# Altium PCB A1.PcbDoc (part 3 of 3)
Units mil, origin at the board's own origin, x right, y up, seen from the top; angles counter-clockwise.
Board outline 3937.01 x 3149.61 mil, 2 copper layers (Top Layer, Bottom Layer); 91 components, 93 nets, 317 pads, 42 vias.
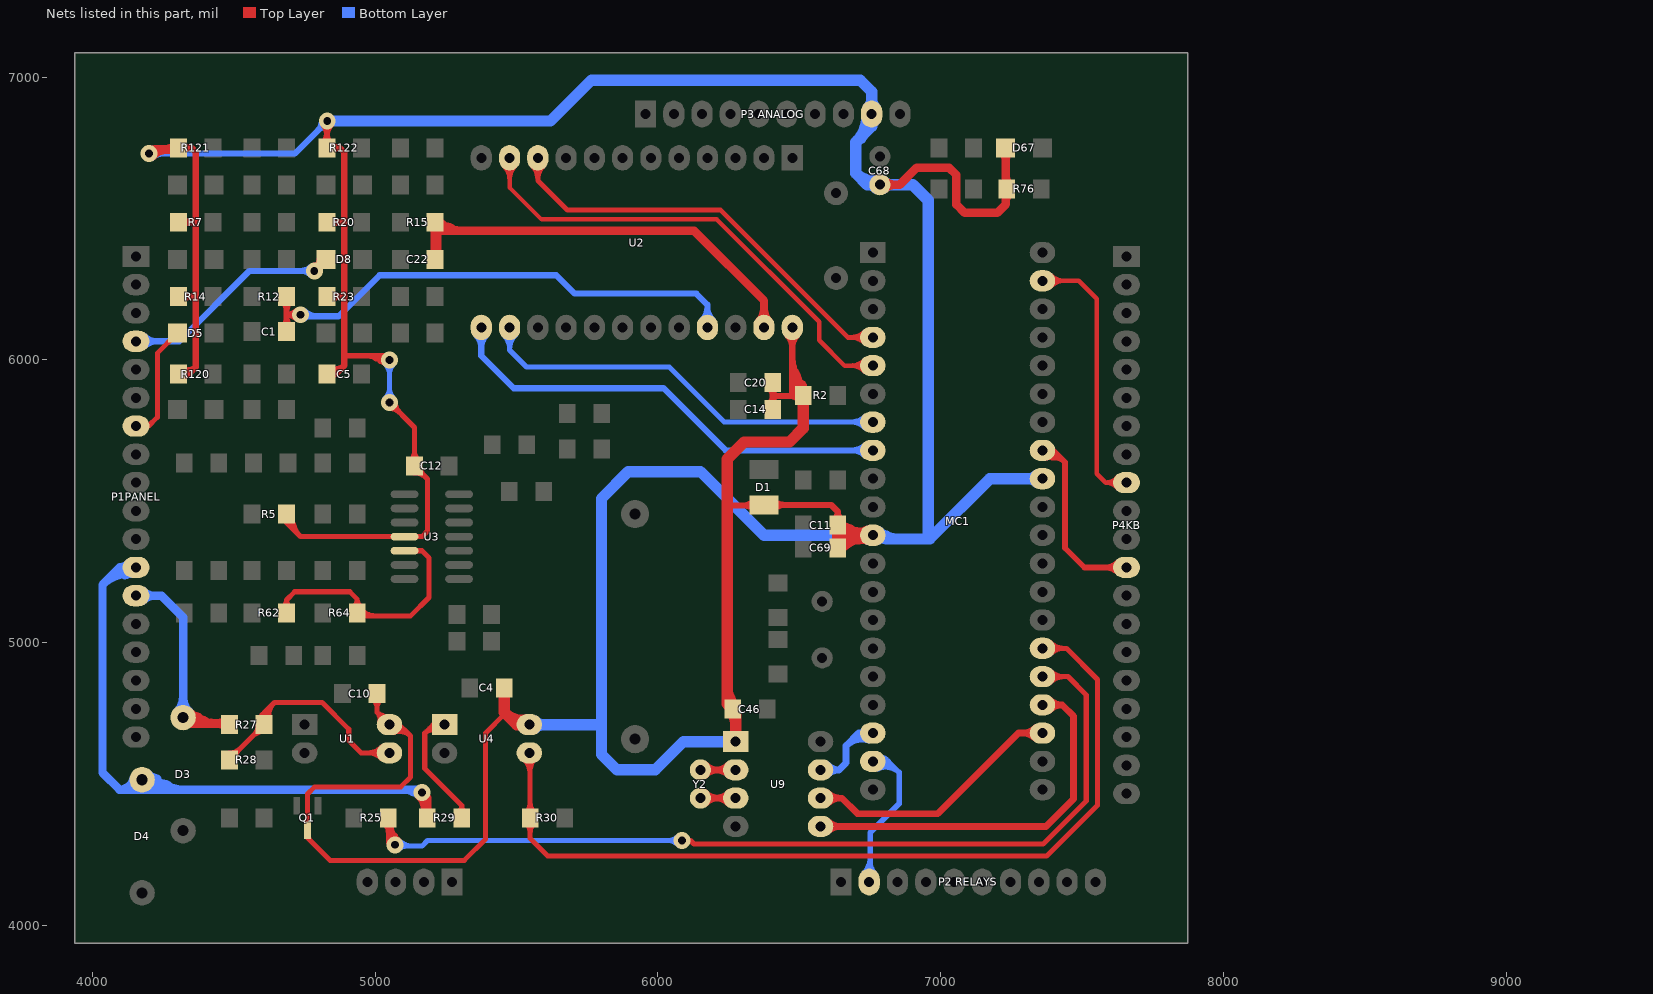
[diagram p3: the nets of this part, all layers, seen from the top]

## Via types
v1: diameter 60, hole 28, Top Layer to Bottom Layer, 31 vias
v2: diameter 90, hole 35.43, Top Layer to Bottom Layer, 6 vias
v3: diameter 75, hole 28, Top Layer to Bottom Layer, 3 vias
v4: diameter 75, hole 35.43, Top Layer to Bottom Layer, 2 vias

## Nets (pads, with @x,y where several pads share a name; then routed paths per layer and width w, separated by ;. In a path a pad name is that pad's centre, name@x,y a point inside that pad or via, vN(x,y) a via of type N, cw(c..) or ccw(c..) an arc to the next point about the centre after c; other vN are vias at no path point) (continued)
NetR27_1: R27.1 R28.2 U1.3 | length 1776.5
  Top Layer w18: R28.2@4483.98,4585 4483.98,4587.95 R27.1@4606.02,4710 4606.02,4751.02 ; 4573.58,4676.84 ccw(c4562.58,4717.89) R27.1@4603.59,4706.73 ; U1.3@5050,4610 4950,4610 4906,4654 4906,4694 4812,4788 4643,4788 ; 4606.02,4751.02 ccw(c4629.26,4751.02) 4616.92,4731.33 cw(c4629.26,4751.02) 4606.02,4751.02 ; 4606.02,4751.02 cw(c4582.79,4751.02) 4595.13,4731.33 ccw(c4582.79,4751.02) 4606.02,4751.02 ; 4606.02,4751.02 4643,4788 ; 4643,4788 ccw(c4691.63,4739.37) 4625.7,4719.78 cw(c4691.63,4739.37) 4643,4788 ; 4973.69,4610 ccw(c4973.69,4678.81) 5022.35,4630.15 cw(c4973.69,4678.81) 4973.69,4610 ; 4973.69,4610 cw(c4973.69,4541.19) 5022.35,4589.85 ccw(c4973.69,4541.19) 4973.69,4610 ; R28.2@4483.98,4609.46 ccw(c4483.98,4661.4) 4520.7,4624.68 cw(c4483.98,4661.4) R28.2@4483.98,4609.46 ; R28.2@4504.5,4588.94 cw(c4551.68,4588.94) 4518.32,4622.3 ccw(c4551.68,4588.94) R28.2@4504.5,4588.94 ; 4564.26,4668.24 cw(c4606.02,4626.47) 4606.02,4685.54 ccw(c4606.02,4626.47) 4564.26,4668.24 ; 4573.77,4677.74 ccw(c4545.44,4706.06) 4585.5,4706.06 cw(c4545.44,4706.06) 4573.77,4677.74 ; R27.1@4591.19,4709.53 cw(c4625.71,4719.79) 4600.25,4745.25 ccw(c4625.71,4719.79) R27.1@4591.19,4709.53 ; R27.1@4608.45,4714.66 cw(c4658.67,4729.58) 4621.62,4766.62 ccw(c4658.67,4729.58) R27.1@4608.45,4714.66
NetR29_2: R29.2 U4.1 | length 738
  Top Layer w18: U4.1@5245,4710 5205,4710 5175,4680 ; R29.2@5306.02,4380 5306.02,4423.98 5175,4555 5175,4680 ; 5175,4680 cw(c5202.43,4652.57) 5222.65,4685.68 ccw(c5202.43,4652.57) 5175,4680 ; 5306.02,4423.97 ccw(c5334.81,4423.97) 5318.01,4400.6 cw(c5334.81,4423.97) 5306.02,4423.97 ; 5306.02,4423.97 cw(c5277.24,4423.97) 5294.04,4400.6 ccw(c5277.24,4423.97) 5306.02,4423.97 ; 5191.17,4696.17 cw(c5214.69,4672.65) 5232.03,4701.04 ccw(c5214.69,4672.65) 5191.17,4696.17
NetR62_2: R62.2 R64.2 U3.5 | length 1298.6
  Top Layer w18: R62.2@4686.02,5105 4686.02,5151.02 ; U3.5@5103.54,5325 5165,5325 5190,5300 5190,5160 5125,5095 4946.02,5095 R64.2@4936.02,5105 4936.02,5153.98 4910,5180 4715,5180 4686.02,5151.02 ; 4686.02,5151.02 ccw(c4718.9,5151.02) 4698.66,5125.11 cw(c4718.9,5151.02) 4686.02,5151.02 ; 4686.02,5151.02 cw(c4653.15,5151.02) 4673.39,5125.11 ccw(c4653.15,5151.02) 4686.02,5151.02 ; 4936.02,5153.97 ccw(c4975.17,5153.97) 4949.49,5124.43 cw(c4975.17,5153.97) 4936.02,5153.97 ; 4936.02,5153.97 cw(c4896.88,5153.97) 4922.56,5124.43 ccw(c4896.88,5153.97) 4936.02,5153.97 ; R64.2@4950.54,5086.55 cw(c4970.94,5066.14) 4970.94,5095 ccw(c4970.94,5066.14) R64.2@4950.54,5086.55 ; R64.2@4950.54,5115.58 ccw(c5000.22,5165.26) 5000.22,5095 cw(c5000.22,5165.26) R64.2@4950.54,5115.58
NetU9_2: U9.2 Y2.1 | length 511.8
  Top Layer w24: Y2.1@6150,4550 U9.2@6275,4550 ; 6205.94,4550 ccw(c6205.94,4611.56) 6249.47,4568.03 cw(c6205.94,4611.56) 6205.94,4550 ; 6205.94,4550 cw(c6205.94,4488.44) 6249.47,4531.97 ccw(c6205.94,4488.44) 6205.94,4550 ; 6211.56,4550 ccw(c6211.56,4488.44) 6168.03,4531.97 cw(c6211.56,4488.44) 6211.56,4550 ; 6211.56,4550 cw(c6211.56,4611.56) 6168.03,4568.03 ccw(c6211.56,4611.56) 6211.56,4550
NetU9_3: U9.3 Y2.2 | length 511.8
  Top Layer w24: Y2.2@6150,4450 U9.3@6275,4450 ; 6205.94,4450 ccw(c6205.94,4511.56) 6249.47,4468.03 cw(c6205.94,4511.56) 6205.94,4450 ; 6205.94,4450 cw(c6205.94,4388.44) 6249.47,4431.97 ccw(c6205.94,4388.44) 6205.94,4450 ; 6211.56,4450 ccw(c6211.56,4388.44) 6168.03,4431.97 cw(c6211.56,4388.44) 6211.56,4450 ; 6211.56,4450 cw(c6211.56,4511.56) 6168.03,4468.03 ccw(c6211.56,4511.56) 6211.56,4450
PREHEATER: "P2 RELAYS.2" MC1.19 | length 1259.4
  Bottom Layer w20: 6747.24,4153.54 6751,4157.3 6751,4328 6853,4430 6853,4541 ; MC1.19@6760,4580 6814,4580 ; 6814,4580 ccw(c6814,4554.44) 6791.6,4566.75 cw(c6814,4554.44) 6814,4580 ; 6814,4580 cw(c6814,4605.56) 6791.6,4593.25 ccw(c6814,4605.56) 6814,4580 ; 6814,4580 6853,4541 ; 6853,4541 ccw(c6805.72,4493.72) 6778.64,4554.86 cw(c6805.72,4493.72) 6853,4541 ; 6727.8,4182.99 ccw(c6671.79,4239) 6751,4239 cw(c6671.79,4239) 6727.8,4182.99 ; 6751,4220.87 ccw(c6804.57,4220.87) 6766.69,4182.99 cw(c6804.57,4220.87) 6751,4220.87 ; MC1.19@6762.44,4591.43 cw(c6780.4,4550.88) 6811.76,4582.24 ccw(c6780.4,4550.88) MC1.19@6762.44,4591.43 ; MC1.19@6770.54,4573.14 cw(c6793.06,4522.3) 6832.38,4561.62 ccw(c6793.06,4522.3) MC1.19@6770.54,4573.14
R1IN: D4.2 P1PANEL.12 R29.1 | length 4132.7
  Top Layer w30: v1(5165,4470) 5183.98,4451.02 R29.1@5183.98,4380 ; R29.1@5171.39,4391.2 ccw(c5137.93,4410.52) 5175.26,4420.52 ; 5176.35,4421.36 cw(c5209.68,4440.6) v1@5177.53,4461.75 ; 5176.56,4415.65 ccw(c5206.99,4423.8) R29.1@5191.24,4396.52 ; 5183.98,4419.01 ccw(c5219.05,4419.01) 5194.25,4394.21 cw(c5219.05,4419.01) 5183.98,4419.01 ; 5183.98,4419.01 cw(c5148.9,4419.01) 5173.7,4394.21 ccw(c5148.9,4419.01) 5183.98,4419.01 ; v1@5154.39,4459.39 cw(c5082.97,4387.97) 5183.98,4387.97 ccw(c5082.97,4387.97) v1@5154.39,4459.39
  Bottom Layer w30: 4113.45,5238.8 ccw(c4103.76,5294.05) P1PANEL.12@4149.68,5261.83 ; P1PANEL.12@4153.54,5266.14 4096.14,5266.14 ; D4.2@4186.12,4487.14 cw(c4204.18,4441.84) 4228.57,4484.07 cw(c4252.95,4526.31) D4.2@4204.69,4519.31 ; D4.2@4192.74,4490.81 cw(c4233.39,4435.38) 4267.76,4494.91 ; 4227.95,4517.89 ccw(c4203.69,4475.88) D4.2@4175,4515 ; 5130.1,4473.42 ccw(c5138.62,4488.17) v1@5152.65,4478.51 ; v1(5165,4470) 5155,4480 D4.2@4175,4480 ; 4035,5205 cw(c4129.75,5110.25) 4141.56,5243.73 ccw(c4129.75,5110.25) 4035,5205 ; 4035,5205 4096.14,5266.14 ; 4035,5205 4035,4540 4095,4480 ; 4095,4480 ccw(c4095,4531.73) 4145.64,4521.14 cw(c4095,4531.73) 4095,4480 ; 4095,4480 D4.2@4175,4480 ; 4096.14,5266.14 ccw(c4096.14,5304.82) 4126.11,5280.37 cw(c4096.14,5304.82) 4096.14,5266.14 ; 4096.14,5266.14 cw(c4096.14,5227.46) 4126.11,5251.92 ccw(c4096.14,5227.46) 4096.14,5266.14 ; D4.2@4175,4480 D4.2@4175,4515 ; D4.2@4175,4515 cw(c4131.92,4524.01) 4131.92,4480 ccw(c4131.92,4524.01) D4.2@4175,4515 ; D4.2@4175,4515 ccw(c4259.5,4599.5) 4259.5,4480 cw(c4259.5,4599.5) D4.2@4175,4515 ; 4080.44,5250.44 cw(c4137.14,5193.74) 4144.2,5273.61 ccw(c4137.14,5193.74) 4080.44,5250.44 ; D4.2@4196.21,4536.21 ccw(c4331.92,4671.92) 4331.92,4480 cw(c4331.92,4671.92) D4.2@4196.21,4536.21 ; 5104.64,4480 cw(c5104.64,4409.64) 5154.39,4459.39 ccw(c5104.64,4409.64) 5104.64,4480
RC6: MC1.25 R25.1 | length 4520.1
  Top Layer w18: R25.1@5036.1,4358.1 cw(c5012.01,4314.5) 5060.12,4327.39 ; v1@5051.99,4295.8 ccw(c5036.01,4305.38) 5051.14,4316.24 ccw(c5071.12,4330.58) v1@5070.52,4305.99 ; v1@5054.39,4299.05 ccw(c5030.99,4320.12) 5056.57,4338.49 ; 5059.2,4330.83 cw(c5103.71,4342.76) R25.1@5063.8,4365.8 ; v1@5067.77,4287.01 ccw(c5048,4304.81) 5069.61,4320.33 ; v1(5070,4285) 5070,4280 5046.02,4303.98 ; v1(6085,4300) 6115,4300 6127.5,4287.5 7362.5,4287.5 7515,4440 7515,4815 7450,4880 MC1.25@7360,4880 ; 5046.02,4303.98 ccw(c5053.14,4311.09) 5058.6,4302.64 cw(c5053.14,4311.09) 5046.02,4303.98 ; 5046.02,4303.98 cw(c5036.03,4293.98) 5049.7,4290.37 ccw(c5036.03,4293.98) 5046.02,4303.98 ; 5046.02,4303.98 R25.1@5046.02,4380 ; 5046.02,4326.51 ccw(c4996.47,4326.51) 5031.51,4361.55 cw(c4996.47,4326.51) 5046.02,4326.51 ; 5046.02,4326.51 cw(c5095.58,4326.51) 5060.54,4361.55 ccw(c5095.58,4326.51) 5046.02,4326.51 ; R25.1@5046.02,4380 ccw(c5147.83,4380) 5083.31,4301.24 cw(c5147.83,4380) R25.1@5046.02,4380 ; 7436.31,4880 ccw(c7436.31,4811.19) 7387.65,4859.85 cw(c7436.31,4811.19) 7436.31,4880 ; 7436.31,4880 cw(c7436.31,4948.81) 7387.65,4900.15 ccw(c7436.31,4948.81) 7436.31,4880 ; 5046.02,4303.96 ccw(c5085.53,4303.96) 5060.49,4273.4 cw(c5085.53,4303.96) 5046.02,4303.96 ; 5046.02,4341.98 ccw(c5116.68,4341.98) 5071.9,4287.32 cw(c5116.68,4341.98) 5046.02,4341.98
  Bottom Layer w18: v1(5070,4285) 5070,4280 5165,4280 5185,4300 v1(6085,4300) ; 6034.3,4300 ccw(c6034.3,4350.7) 6070.15,4314.85 cw(c6034.3,4350.7) 6034.3,4300 ; 6034.3,4300 cw(c6034.3,4249.3) 6070.15,4285.15 ccw(c6034.3,4249.3) 6034.3,4300 ; v1@5084.85,4270.15 cw(c5108.63,4246.37) 5108.63,4280 ccw(c5108.63,4246.37) v1@5084.85,4270.15 ; v1@5084.85,4299.85 ccw(c5132.77,4347.77) 5132.77,4280 cw(c5132.77,4347.77) v1@5084.85,4299.85
RC7: MC1.26 R30.1 U4.3 | length 3840.7
  Top Layer w18: U4.3@5545,4610 5547.95,4607.05 R30.1@5547.95,4380 5547.95,4307.05 5610,4245 7375,4245 7555,4425 7555,4870 7445,4980 MC1.26@7360,4980 ; 5547.95,4326.51 ccw(c5498.39,4326.51) 5533.44,4361.55 cw(c5498.39,4326.51) 5547.95,4326.51 ; 5547.95,4326.51 cw(c5597.51,4326.51) 5562.47,4361.55 ccw(c5597.51,4326.51) 5547.95,4326.51 ; 5547.95,4433.49 ccw(c5597.51,4433.49) 5562.47,4398.45 cw(c5597.51,4433.49) 5547.95,4433.49 ; 5547.95,4433.49 cw(c5498.39,4433.49) 5533.44,4398.45 ccw(c5498.39,4433.49) 5547.95,4433.49 ; 7436.31,4980 ccw(c7436.31,4911.19) 7387.65,4959.85 cw(c7436.31,4911.19) 7436.31,4980 ; 7436.31,4980 cw(c7436.31,5048.81) 7387.65,5000.15 ccw(c7436.31,5048.81) 7436.31,4980 ; U4.3@5524.85,4589.85 cw(c5469.07,4534.07) 5547.95,4534.07 ccw(c5469.07,4534.07) U4.3@5524.85,4589.85 ; 5547.95,4548.32 cw(c5606.68,4548.32) 5565.15,4589.85 ccw(c5606.68,4548.32) 5547.95,4548.32
REMOT: C1.2 R12.2 U2.21 | length 2569.3
  Top Layer w22: C1.2@4686.02,6100 4686.02,6160 ; R12.2@4686.02,6224.43 4686.02,6160 ; v1(4735,6160) 4686.02,6160 ; 4686.02,6148.67 ccw(c4730.75,6148.67) 4699.12,6117.04 cw(c4730.75,6148.67) 4686.02,6148.67 ; 4686.02,6148.67 cw(c4641.29,6148.67) 4672.92,6117.04 ccw(c4641.29,6148.67) 4686.02,6148.67 ; 4686.02,6175.76 ccw(c4641.29,6175.76) 4672.92,6207.39 cw(c4641.29,6175.76) 4686.02,6175.76 ; 4686.02,6175.76 cw(c4730.75,6175.76) 4699.12,6207.39 ccw(c4730.75,6175.76) 4686.02,6175.76 ; 4689.13,6160 ccw(c4689.13,6205.87) 4721.56,6173.44 cw(c4689.13,6205.87) 4689.13,6160 ; 4689.13,6160 cw(c4689.13,6114.13) 4721.56,6146.56 ccw(c4689.13,6114.13) 4689.13,6160
  Bottom Layer w22: v1(4735,6160) 4740,6155 4870,6155 5015,6300 5640,6300 5705,6235 6135,6235 6175,6195 U2.21@6175,6115 ; 6175,6186.48 ccw(c6238.98,6186.48) 6193.74,6141.24 cw(c6238.98,6186.48) 6175,6186.48 ; 6175,6186.48 cw(c6111.02,6186.48) 6156.26,6141.24 ccw(c6111.02,6186.48) 6175,6186.48 ; v1@4748.44,6146.56 cw(c4768.8,6126.2) 4768.8,6155 ccw(c4768.8,6126.2) v1@4748.44,6146.56 ; v1@4748.44,6173.44 ccw(c4792.94,6217.94) 4792.94,6155 cw(c4792.94,6217.94) v1@4748.44,6173.44
REMOTIN: D5.2 P1PANEL.7 | length 415.7
  Top Layer w18: P1PANEL.7@4153.54,5766.14 4198.14,5766.14 4229,5797 4229,6023.96 D5.2@4300.04,6095
RESET: MC1.33 P4KB.12 | length 1038.9
  Top Layer w20: MC1.33@7359.04,5670.79 ccw(c7399.98,5715.36) 7402.55,5654.9 ; MC1.33@7360,5680 7398,5680 7440,5638 ; P4KB.12@7628.03,5246.7 ccw(c7581.09,5199.75) 7581.09,5266.14 ccw(c7581.09,5332.53) P4KB.12@7628.03,5285.59 ; P4KB.12@7657.48,5266.14 7508.86,5266.14 7440,5335 7440,5638 ; 7440,5638 ccw(c7394.87,5592.87) 7375.74,5653.76 cw(c7394.87,5592.87) 7440,5638 ; MC1.33@7369.75,5672.84 cw(c7383.71,5628.38) 7416.66,5661.34 ccw(c7383.71,5628.38) MC1.33@7369.75,5672.84
RSTART: C22.2 R15.2 U2.23 | length 2566.9
  Top Layer w30: R15.2@5211.02,6487.21 C22.2@5211.02,6355.82 5220,6364.79 5220,6457 6128,6457 6375,6210 U2.23@6375,6115 ; 5213.71,6392.47 ccw(c5226.85,6384.89) C22.2@5218.76,6372.05 ; 5213.71,6450.56 cw(c5226.85,6458.14) R15.2@5218.76,6470.98 ; R15.2@5216.17,6469.69 cw(c5238.57,6410.49) 5270.21,6465.3 ; C22.2@5200.75,6370.03 ccw(c5154.28,6416.5) 5220,6416.5 cw(c5154.28,6416.5) C22.2@5200.75,6370.03 ; C22.2@5200.75,6370.03 ccw(c5175.95,6394.83) 5211.02,6394.83 ; C22.2@5200.75,6370.03 ccw(c5175.95,6394.83) 5211.02,6394.83 ; R15.2@5200.75,6473 cw(c5154.28,6426.53) 5220,6426.53 ccw(c5154.28,6426.53) R15.2@5200.75,6473 ; R15.2@5200.75,6473 cw(c5175.95,6448.2) 5211.02,6448.2 ; R15.2@5200.75,6473 cw(c5175.95,6448.2) 5211.02,6448.2 ; 5211.02,6394.83 ccw(c5246.1,6394.83) 5221.3,6370.03 cw(c5246.1,6394.83) 5211.02,6394.83 ; 5211.02,6448.2 cw(c5246.1,6448.2) 5221.3,6473 ccw(c5246.1,6448.2) 5211.02,6448.2 ; 6375,6176.82 ccw(c6429.32,6176.82) 6390.91,6138.41 cw(c6429.32,6176.82) 6375,6176.82 ; 6375,6176.82 cw(c6320.68,6176.82) 6359.09,6138.41 ccw(c6320.68,6176.82) 6375,6176.82 ; R15.2@5200.08,6472.33 ccw(c5237.1,6509.35) 5237.1,6457 cw(c5237.1,6509.35) R15.2@5200.08,6472.33 ; R15.2@5221.3,6493.55 ccw(c5309.53,6581.78) 5309.53,6457 cw(c5309.53,6581.78) R15.2@5221.3,6493.55
RSTARTIN: D8.2 P1PANEL.4 | length 1743.3
  Top Layer w22: v1@4781.28,6315.6 cw(c4811.44,6309.43) D8.2@4803.47,6339.16 ; v1(4784.22,6315) D8.2@4825.04,6355.82 ; v1@4784.82,6312.06 ccw(c4778.65,6342.21) D8.2@4808.38,6334.25 ; v1@4785.49,6333.96 ccw(c4786.59,6350.54) D8.2@4800.99,6342.23 ; v1@4785.49,6333.96 ccw(c4786.59,6350.54) D8.2@4800.99,6342.23 ; v1@4785.49,6333.96 ccw(c4786.59,6350.54) D8.2@4800.99,6342.23 ; v1@4786.69,6317.47 ccw(c4748.34,6355.82) 4802.58,6355.82 cw(c4748.34,6355.82) v1@4786.69,6317.47 ; v1@4786.69,6317.47 cw(c4825.04,6279.12) 4825.04,6333.35 ccw(c4825.04,6279.12) v1@4786.69,6317.47 ; D8.2@4793.44,6331.61 ccw(c4802.31,6347.6) D8.2@4811.45,6331.77 ; D8.2@4793.44,6331.61 ccw(c4802.31,6347.6) D8.2@4811.45,6331.77 ; D8.2@4793.44,6331.61 ccw(c4802.31,6347.6) D8.2@4811.45,6331.77 ; D8.2@4800.84,6324.22 cw(c4816.82,6333.09) D8.2@4800.99,6342.23 ; D8.2@4800.84,6324.22 cw(c4816.82,6333.09) D8.2@4800.99,6342.23 ; D8.2@4800.84,6324.22 cw(c4816.82,6333.09) D8.2@4800.99,6342.23 ; v1@4803.18,6316.26 cw(c4819.77,6317.37) D8.2@4811.45,6331.77 ; v1@4803.18,6316.26 cw(c4819.77,6317.37) D8.2@4811.45,6331.77 ; v1@4803.18,6316.26 cw(c4819.77,6317.37) D8.2@4811.45,6331.77 ; D8.2@4816.66,6347.44 ccw(c4849.09,6315) 4803.22,6315 cw(c4849.09,6315) D8.2@4816.66,6347.44 ; D8.2@4816.66,6347.44 cw(c4784.22,6379.87) 4784.22,6334 ccw(c4784.22,6379.87) D8.2@4816.66,6347.44
  Bottom Layer w22: P1PANEL.4@4153.54,6066.14 4306.14,6066.14 4555,6315 v1(4784.22,6315) ; 4227.52,6066.14 ccw(c4227.52,6002.17) 4182.28,6047.4 cw(c4227.52,6002.17) 4227.52,6066.14 ; 4227.52,6066.14 cw(c4227.52,6130.12) 4182.28,6084.88 ccw(c4227.52,6130.12) 4227.52,6066.14 ; 4738.35,6315 ccw(c4738.35,6360.87) 4770.79,6328.44 cw(c4738.35,6360.87) 4738.35,6315 ; 4738.35,6315 cw(c4738.35,6269.13) 4770.79,6301.56 ccw(c4738.35,6269.13) 4738.35,6315
S0: MC1.4 U2.10 | length 1962.2
  Top Layer w18: U2.10@5575,6750 U2.10@5575,6715 5575,6635 5680,6530 6221.67,6530 6671.67,6080 MC1.4@6760,6080 ; 5575,6638.69 ccw(c5506.19,6638.69) 5554.85,6687.35 cw(c5506.19,6638.69) 5575,6638.69 ; 5575,6638.69 cw(c5643.81,6638.69) 5595.15,6687.35 ccw(c5643.81,6638.69) 5575,6638.69 ; 6683.69,6080 ccw(c6683.69,6148.81) 6732.35,6100.15 cw(c6683.69,6148.81) 6683.69,6080 ; 6683.69,6080 cw(c6683.69,6011.19) 6732.35,6059.85 ccw(c6683.69,6011.19) 6683.69,6080
S1: MC1.5 U2.11 | length 2171.5
  Top Layer w16: U2.11@5475,6750 U2.11@5475,6715 5475,6610 5588,6497 6208,6497 6570,6135 6570,6070 6660,5980 MC1.5@6760,5980 ; 5475,6636.28 ccw(c5403.78,6636.28) 5454.14,6686.64 cw(c5403.78,6636.28) 5475,6636.28 ; 5475,6636.28 cw(c5546.22,6636.28) 5495.86,6686.64 ccw(c5546.22,6636.28) 5475,6636.28 ; 6681.28,5980 ccw(c6681.28,6051.22) 6731.64,6000.86 cw(c6681.28,6051.22) 6681.28,5980 ; 6681.28,5980 cw(c6681.28,5908.78) 6731.64,5959.14 ccw(c6681.28,5908.78) 6681.28,5980
S2: MC1.7 U2.14 | length 1902.9
  Bottom Layer w18: U2.14@5475,6115 5475,6035 5535,5975 6040,5975 6234,5781 6759,5781 MC1.7@6760,5780 ; 5475,6038.69 ccw(c5406.19,6038.69) 5454.85,6087.35 cw(c5406.19,6038.69) 5475,6038.69 ; 5475,6038.69 cw(c5543.81,6038.69) 5495.15,6087.35 ccw(c5543.81,6038.69) 5475,6038.69 ; 6681.28,5781 cw(c6681.28,5708.78) 6732.35,5759.85 ccw(c6681.28,5708.78) 6681.28,5781 ; 6686.11,5781 ccw(c6686.11,5846.39) 6732.35,5800.15 cw(c6686.11,5846.39) 6686.11,5781
S3: MC1.8 U2.13 | length 2025.7
  Bottom Layer w22: U2.13@5375,6115 5375,6015 5490,5900 6020,5900 6240,5680 MC1.8@6760,5680 ; 5375,6043.52 ccw(c5311.02,6043.52) 5356.26,6088.76 cw(c5311.02,6043.52) 5375,6043.52 ; 5375,6043.52 cw(c5438.98,6043.52) 5393.74,6088.76 ccw(c5438.98,6043.52) 5375,6043.52 ; 6688.52,5680 ccw(c6688.52,5743.98) 6733.76,5698.74 cw(c6688.52,5743.98) 6688.52,5680 ; 6688.52,5680 cw(c6688.52,5616.02) 6733.76,5661.26 ccw(c6688.52,5616.02) 6688.52,5680
SPIIO: MC1.23 U9.6 | length 1312.6
  Top Layer w24: U9.6@6575,4450 6650,4450 6705,4395 6990,4395 7275,4680 MC1.23@7360,4680 ; 6644.06,4450 ccw(c6644.06,4388.44) 6600.53,4431.97 cw(c6644.06,4388.44) 6644.06,4450 ; 6644.06,4450 cw(c6644.06,4511.56) 6600.53,4468.03 ccw(c6644.06,4511.56) 6644.06,4450 ; 7290.94,4680 ccw(c7290.94,4741.56) 7334.47,4698.03 cw(c7290.94,4741.56) 7290.94,4680 ; 7290.94,4680 cw(c7290.94,4618.44) 7334.47,4661.97 ccw(c7290.94,4618.44) 7290.94,4680
SPIRST: MC1.24 U9.5 | length 1741.4
  Top Layer w24: U9.5@6575,4350 7372.67,4350 7470,4447.33 7470,4740 7430,4780 MC1.24@7360,4780 ; 6644.06,4350 ccw(c6644.06,4288.44) 6600.53,4331.97 cw(c6644.06,4288.44) 6644.06,4350 ; 6644.06,4350 cw(c6644.06,4411.56) 6600.53,4368.03 ccw(c6644.06,4411.56) 6644.06,4350 ; 7429.06,4780 ccw(c7429.06,4718.44) 7385.53,4761.97 cw(c7429.06,4718.44) 7429.06,4780 ; 7429.06,4780 cw(c7429.06,4841.56) 7385.53,4798.03 ccw(c7429.06,4841.56) 7429.06,4780
SPISCLK: MC1.18 U9.7 | length 846.5
  Bottom Layer w24: U9.7@6575,4550 6640,4550 ; MC1.18@6760,4680 6710,4680 ; 6640,4550 ccw(c6640,4497.93) 6601.4,4532.88 cw(c6640,4497.93) 6640,4550 ; 6640,4550 cw(c6640,4602.07) 6601.4,4567.12 ccw(c6640,4602.07) 6640,4550 ; 6640,4550 6665,4575 6665,4635 ; 6665,4635 cw(c6722.48,4577.53) 6745.33,4655.53 ccw(c6722.48,4577.53) 6665,4635 ; 6665,4635 6710,4680 ; 6710,4680 ccw(c6710,4702.66) 6730,4692 cw(c6710,4702.66) 6710,4680 ; 6710,4680 cw(c6710,4657.34) 6730,4668 ccw(c6710,4657.34) 6710,4680 ; 6693.62,4663.62 cw(c6735.45,4621.8) 6752.08,4678.56 ccw(c6735.45,4621.8) 6693.62,4663.62
TIOUT: D3.2 P1PANEL.13 R27.2 | length 2038.6
  Top Layer w24: D3.2@4320,4735 4345,4710 R27.2@4483.98,4710 ; D3.2@4327.02,4729.37 cw(c4357.59,4704.89) 4377.17,4738.8 ; D3.2@4344,4712.35 cw(c4359.42,4697.8) 4370.02,4716.16 cw(c4388.2,4747.65) D3.2@4352.45,4741.02 ; D3.2@4345.75,4714.37 cw(c4379.65,4687.21) 4401.37,4724.83 ; 4418.43,4720.06 ccw(c4435.97,4792.57) R27.2@4474.84,4728.9 ; 4418.43,4720.06 ccw(c4435.97,4792.57) R27.2@4474.84,4728.9 ; 4418.43,4720.06 ccw(c4435.97,4792.57) R27.2@4474.84,4728.9 ; 4441.66,4710 ccw(c4441.66,4752.32) 4471.58,4722.39 cw(c4441.66,4752.32) 4441.66,4710 ; 4441.66,4710 cw(c4441.66,4667.68) 4471.58,4697.61 ccw(c4441.66,4667.68) 4441.66,4710 ; D3.2@4326.36,4741.36 ccw(c4402.08,4817.08) 4402.08,4710 cw(c4402.08,4817.08) D3.2@4326.36,4741.36 ; D3.2@4343.33,4758.33 ccw(c4460.02,4875.02) 4460.02,4710 cw(c4460.02,4875.02) D3.2@4343.33,4758.33
  Bottom Layer w30: P1PANEL.13@4153.54,5166.14 4243.86,5166.14 4320,5090 D3.2@4320,4735 ; 4217.86,5166.14 ccw(c4217.86,5111.82) 4179.45,5150.23 cw(c4217.86,5111.82) 4217.86,5166.14 ; 4217.86,5166.14 cw(c4217.86,5220.46) 4179.45,5182.05 ccw(c4217.86,5220.46) 4217.86,5166.14 ; 4320,4807.43 ccw(c4392.43,4807.43) 4341.21,4756.21 cw(c4392.43,4807.43) 4320,4807.43 ; 4320,4807.43 cw(c4247.57,4807.43) 4298.79,4756.21 ccw(c4247.57,4807.43) 4320,4807.43
UP: MC1.39 P4KB.9 | length 1273
  Top Layer w16: MC1.39@7360,6280 7489,6280 7552,6217 7552,5598 7583.86,5566.14 ; P4KB.9@7624.96,5547.08 ccw(c7583.86,5512.29) 7583.86,5566.14 ; P4KB.9@7624.96,5585.2 cw(c7583.86,5619.99) 7583.86,5566.14 ; P4KB.9@7657.48,5566.14 7583.86,5566.14 ; 7438.72,6280 ccw(c7438.72,6208.78) 7388.36,6259.14 cw(c7438.72,6208.78) 7438.72,6280 ; 7438.72,6280 cw(c7438.72,6351.22) 7388.36,6300.86 ccw(c7438.72,6351.22) 7438.72,6280
VCC: "P3 ANALOG.9" C4.2 C5.2 C10.2 C11.2 C12.2 C14.2 C20.2 C46.2 C68.2 C69.2 D1.1 D67.2 MC1.11 MC1.32 Q1.3 R2.2 R5.1 R7.1 R14.1 R20.1 R23.1 R76.1 R120.2 R121.2 R122.2 U1.4 U2.24 U3.4 U4.4 U9.1 | length 28464.5
  Top Layer w18: R5.1@4680.13,5431.4 cw(c4673.48,5409.19) 4696.19,5413.87 cw(c4725.03,5419.82) R5.1@4702.05,5438.23 ; R5.1@4684.63,5448.95 cw(c4644.07,5387.3) 4716.35,5402.21 ; R5.1@4686.02,5455 4686.02,5423.98 4735,5375 ; Q1.3@4758.59,4314.57 cw(c4750.57,4300.67) 4766.08,4304.82 ; 4890,6015 5035,6015 v1(5050,6000) ; 4999.61,6005.67 ccw(c5012.51,6028.02) v1@5033.18,6012.57 ; C10.2@5006.02,4840 C10.2@5006.02,4820 5006.02,4753.98 U1.4@5050,4710 5085,4710 5125,4670 ; 5017.16,5995.54 ccw(c5028.86,6015.8) v1@5047.6,6001.8 ; 5021.55,4744.11 cw(c5011.56,4706.83) U1.4@5049.96,4710.76 ; v1@5049.4,5847.06 cw(c5041.55,5808.73) 5079.35,5818.85 ; v1(5050,5850) 5138.98,5761.02 C12.2@5138.98,5625 5185,5578.98 5185,5395 5165,5375 U3.4@5103.54,5375 4735,5375 ; v1@5052.94,5850.6 ccw(c5091.27,5858.45) 5081.15,5820.65 ; C12.2@5141.41,5621.73 ccw(c5182.42,5632.89) 5171.42,5591.84 ; C4.2@5456.02,4840 5460,4836.02 5460,4750 5390,4680 5390,4305 5315,4230 4840,4230 4760,4310 Q1.3@4760,4336.69 4760,4464.57 4785.43,4490 5090,4490 5125,4525 5125,4670 ; 4735,5375 cw(c4804.16,5444.16) 4706.52,5449.87 ccw(c4804.16,5444.16) 4735,5375 ; 5006.02,4766.51 ccw(c4956.47,4766.51) 4991.51,4801.55 cw(c4956.47,4766.51) 5006.02,4766.51 ; 5006.02,4766.51 cw(c5055.58,4766.51) 5020.54,4801.55 ccw(c5055.58,4766.51) 5006.02,4766.51 ; 5085.85,5814.15 ccw(c5050,5778.3) 5050,5829 cw(c5050,5778.3) 5085.85,5814.15 ; 5085.85,5814.15 cw(c5121.7,5850) 5071,5850 ccw(c5121.7,5850) 5085.85,5814.15 ; 5125,4670 ccw(c5085.59,4630.6) 5067.01,4683.13 cw(c5085.59,4630.6) 5125,4670 ; 5138.98,5678.49 ccw(c5188.53,5678.49) 5153.49,5643.45 cw(c5188.53,5678.49) 5138.98,5678.49 ; 5138.98,5678.49 cw(c5089.42,5678.49) 5124.46,5643.45 ccw(c5089.42,5678.49) 5138.98,5678.49 ; R5.1@4688.55,5450.92 ccw(c4750.57,5447.29) 4706.64,5403.36 cw(c4750.57,5447.29) R5.1@4688.55,5450.92 ; Q1.3@4762.81,4317.01 ccw(c4786.51,4317.01) 4769.75,4300.25 cw(c4786.51,4317.01) Q1.3@4762.81,4317.01 ; 4963.09,6015 cw(c4963.09,5913.09) 5035.15,5985.15 ccw(c4963.09,5913.09) 4963.09,6015 ; 5006.03,4753.97 cw(c4980.38,4728.33) 5015.17,4718.07 ccw(c4980.38,4728.33) 5006.03,4753.97 ; 5006.54,6015 cw(c5006.54,5956.54) 5047.88,5997.88 ccw(c5006.54,5956.54) 5006.54,6015 ; 5006.65,4753.35 ccw(c5042.5,4789.2) 5042.5,4738.5 cw(c5042.5,4789.2) 5006.65,4753.35 ; U1.4@5061,4700.1 cw(c5075.05,4660.41) 5104.82,4690.18 ccw(c5075.05,4660.41) U1.4@5061,4700.1 ; C12.2@5138.98,5600.54 cw(c5138.98,5541.47) 5180.74,5583.24 ccw(c5138.98,5541.47) C12.2@5138.98,5600.54 ; C12.2@5159.5,5621.06 ccw(c5199.56,5621.06) 5171.23,5592.74 cw(c5199.56,5621.06) C12.2@5159.5,5621.06 ; C4.2@5441.51,4821.55 cw(c5396.87,4776.91) 5460,4776.91 ccw(c5396.87,4776.91) C4.2@5441.51,4821.55 ; 5460,4796.1 cw(c5495.98,4796.1) 5470.54,4821.55 ccw(c5495.98,4796.1) 5460,4796.1
  Top Layer w22: v1(4200,6730) 4220,6750 R121.2@4303.98,6750 4350,6750 4365,6735 4365,6485 ; v1@4207.34,6747.53 ccw(c4215.77,6767.66) 4226.69,6748.76 ccw(c4234.72,6734.85) v1@4218.82,6732.63 ; v1@4212.2,6744.57 ccw(c4236.5,6773.6) 4255.43,6740.81 ; 4247.7,6737.55 cw(c4262.77,6681.31) R121.2@4294.03,6730.43 ; 4273.92,6744.58 ccw(c4267.95,6766.86) R121.2@4287.93,6755.33 ; R120.2@4303.98,5950 4340,5950 ; R14.1@4303.98,6224.43 4360.57,6224.43 4365,6220 ; R7.1@4303.98,6487.21 4362.79,6487.21 4365,6485 ; C5.2@4828.98,5950 4860,5950 ; R23.1@4828.98,6224.43 4885.57,6224.43 4890,6220 ; R20.1@4828.98,6487.21 4887.79,6487.21 4890,6485 ; v1(4830,6845) 4828.98,6843.98 R122.2@4828.98,6750 4875,6750 4890,6735 4890,6485 ; 6245,5485 6372.99,5485 D1.1@6375,5487.01 6612.99,5487.01 6636.02,5463.98 C11.2@6636.02,5416 ; C14.2@6406.02,5825 6406.02,5872.5 ; C20.2@6406.02,5920 6406.02,5872.5 ; U2.24@6475,6115 6475,5875 ; 6481.73,5885.58 ccw(c6503.7,5898.27) R2.2@6515.61,5875.87 ; 6484.66,5923.01 ccw(c6533.31,5951.1) R2.2@6518.77,5896.83 ; 6487.21,5959.22 cw(c6406.85,5911.53) R2.2@6496.25,5884.33 ; 6492.76,5908.98 cw(c6463.94,5892.35) R2.2@6496.08,5883.73 ; 6512.66,5916.33 cw(c6471.45,5891.87) R2.2@6517.3,5877.93 ; C68.2@6815,6620 6820,6615 6835,6615 ; D67.2@7230.04,6750 7233.98,6746.06 R76.1@7233.98,6605 ; 4259.25,6750 ccw(c4259.25,6794.73) 4290.88,6763.1 cw(c4259.25,6794.73) 4259.25,6750 ; 4259.25,6750 cw(c4259.25,6705.27) 4290.88,6736.9 ccw(c4259.25,6705.27) 4259.25,6750 ; 4340,5950 ccw(c4340,5924.25) 4319.05,5939.22 cw(c4340,5924.25) 4340,5950 ; 4340,5950 cw(c4340,5975.75) 4319.05,5960.78 ccw(c4340,5975.75) 4340,5950 ; 4340,5950 4365,5975 ; 4348.71,6224.43 ccw(c4348.71,6179.7) 4317.08,6211.33 cw(c4348.71,6179.7) 4348.71,6224.43 ; 4348.71,6224.43 cw(c4348.71,6269.16) 4317.08,6237.53 ccw(c4348.71,6269.16) 4348.71,6224.43 ; 4348.71,6487.21 ccw(c4348.71,6442.48) 4317.08,6474.11 cw(c4348.71,6442.48) 4348.71,6487.21 ; 4348.71,6487.21 cw(c4348.71,6531.94) 4317.08,6500.31 ccw(c4348.71,6531.94) 4348.71,6487.21 ; 4348.71,6750 ccw(c4348.71,6705.27) 4317.08,6736.9 cw(c4348.71,6705.27) 4348.71,6750 ; 4348.71,6750 cw(c4348.71,6794.73) 4317.08,6763.1 ccw(c4348.71,6794.73) 4348.71,6750 ; 4365,5975 cw(c4336.1,6003.9) 4314,5969.52 ccw(c4336.1,6003.9) 4365,5975 ; 4365,5975 4365,6220 ; 4365,6220 4365,6485 ; 4828.98,6798.67 ccw(c4873.71,6798.67) 4842.08,6767.04 cw(c4873.71,6798.67) 4828.98,6798.67 ; 4828.98,6798.67 cw(c4784.25,6798.67) 4815.88,6767.04 ccw(c4784.25,6798.67) 4828.98,6798.67 ; 4860,5950 ccw(c4860,5933.29) 4845.29,5941.21 cw(c4860,5933.29) 4860,5950 ; 4860,5950 cw(c4860,5966.71) 4845.29,5958.79 ccw(c4860,5966.71) 4860,5950 ; 4860,5950 4890,5980 ; 4873.71,6224.43 ccw(c4873.71,6179.7) 4842.08,6211.33 cw(c4873.71,6179.7) 4873.71,6224.43 ; 4873.71,6224.43 cw(c4873.71,6269.16) 4842.08,6237.53 ccw(c4873.71,6269.16) 4873.71,6224.43 ; 4873.71,6487.21 ccw(c4873.71,6442.48) 4842.08,6474.11 cw(c4873.71,6442.48) 4873.71,6487.21 ; 4873.71,6487.21 cw(c4873.71,6531.94) 4842.08,6500.31 ccw(c4873.71,6531.94) 4873.71,6487.21 ; 4873.71,6750 ccw(c4873.71,6705.27) 4842.08,6736.9 cw(c4873.71,6705.27) 4873.71,6750 ; 4873.71,6750 cw(c4873.71,6794.73) 4842.08,6763.1 ccw(c4873.71,6794.73) 4873.71,6750 ; 4890,5980 cw(c4856.81,6013.19) 4836.85,5970.71 ccw(c4856.81,6013.19) 4890,5980 ; 4890,5980 4890,6015 4890,6220 ; 4890,6220 4890,6485 ; 6406.02,5872.5 ccw(c6364.08,5872.5) 6393.17,5902.72 cw(c6364.08,5872.5) 6406.02,5872.5 ; 6406.02,5872.5 cw(c6447.97,5872.5) 6418.87,5902.72 ccw(c6447.97,5872.5) 6406.02,5872.5 ; 6406.02,5872.5 ccw(c6447.97,5872.5) 6418.87,5842.28 cw(c6447.97,5872.5) 6406.02,5872.5 ; 6406.02,5872.5 cw(c6364.08,5872.5) 6393.17,5842.28 ccw(c6364.08,5872.5) 6406.02,5872.5 ; 6406.02,5872.5 6511.48,5872.5 R2.2@6513.98,5875 6475,5875 ; 6446.95,5487.01 ccw(c6446.95,5432.77) 6408.6,5471.12 cw(c6446.95,5432.77) 6446.95,5487.01 ; 6446.95,5487.01 cw(c6446.95,5541.24) 6408.6,5502.89 ccw(c6446.95,5541.24) 6446.95,5487.01 ; 6475,5875 ccw(c6475,5906.73) 6499.61,5886.7 cw(c6475,5906.73) 6475,5875 ; 6475,5875 cw(c6475,5843.27) 6499.61,5863.3 ccw(c6475,5843.27) 6475,5875 ; 6475,6043.52 ccw(c6411.02,6043.52) 6456.26,6088.76 cw(c6411.02,6043.52) 6475,6043.52 ; 6475,6043.52 cw(c6538.98,6043.52) 6493.74,6088.76 ccw(c6538.98,6043.52) 6475,6043.52 ; 6636.02,5463.97 ccw(c6679.09,5463.97) 6648.98,5433.18 cw(c6679.09,5463.97) 6636.02,5463.97 ; 6636.02,5463.97 cw(c6592.95,5463.97) 6623.07,5433.18 ccw(c6592.95,5463.97) 6636.02,5463.97 ; 6835,6615 ccw(c6835,6572.62) 6804.23,6601.77 cw(c6835,6572.62) 6835,6615 ; 6835,6615 cw(c6835,6643.93) 6808.9,6631.44 ccw(c6835,6643.93) 6835,6615 ; 7233.98,6653.67 ccw(c7278.71,6653.67) 7247.08,6622.04 cw(c7278.71,6653.67) 7233.98,6653.67 ; 7233.98,6653.67 cw(c7189.25,6653.67) 7220.88,6622.04 ccw(c7189.25,6653.67) 7233.98,6653.67 ; v1@4197.88,6732.12 cw(c4241.04,6688.96) 4241.04,6750 ccw(c4241.04,6688.96) v1@4197.88,6732.12 ; v1@4213.44,6716.56 cw(c4294.15,6635.85) 4294.15,6750 ccw(c4294.15,6635.85) v1@4213.44,6716.56 ; R120.2@4302.1,5951.02 ccw(c4320.99,5980.4) 4345.7,5955.7 cw(c4320.99,5980.4) R120.2@4302.1,5951.02 ; v1@4816.56,6831.56 cw(c4786.6,6801.6) 4828.98,6801.6 ccw(c4786.6,6801.6) v1@4816.56,6831.56 ; C5.2@4827.5,5950.79 ccw(c4842.65,5983.05) 4867.85,5957.85 cw(c4842.65,5983.05) C5.2@4827.5,5950.79 ; 4828.98,6796.66 cw(c4878.34,6796.66) 4843.44,6831.56 ccw(c4878.34,6796.66) 4828.98,6796.66 ; 6298.2,5485 ccw(c6298.2,5546.09) 6341.4,5502.89 cw(c6298.2,5546.09) 6298.2,5485 ; 6307.9,5485 cw(c6307.9,5437.62) 6341.4,5471.12 ccw(c6307.9,5437.62) 6307.9,5485 ; 6465.78,5872.5 cw(c6465.78,5822.86) 6500.88,5857.96 ccw(c6465.78,5822.86) 6465.78,5872.5 ; 6472.72,5872.5 ccw(c6472.72,5912.32) 6500.88,5884.16 cw(c6472.72,5912.32) 6472.72,5872.5 ; 6475,5911.54 ccw(c6546.58,5911.54) 6495.96,5860.93 cw(c6546.58,5911.54) 6475,5911.54 ; 6475,5964.65 ccw(c6599.69,5964.65) 6511.52,5876.48 cw(c6599.69,5964.65) 6475,5964.65 ; 6475,6017.76 ccw(c6652.8,6017.76) 6527.08,5892.04 cw(c6652.8,6017.76) 6475,6017.76 ; D67.2@7214.16,6734.12 cw(c7166.3,6686.26) 7233.98,6686.26 ccw(c7166.3,6686.26) D67.2@7214.16,6734.12 ; 7233.98,6705.27 cw(c7274.77,6705.27) 7245.92,6734.12 ccw(c7274.77,6705.27) 7233.98,6705.27
  Top Layer w30: C68.2@6815,6620 6855,6620 6915,6680 7030,6680 7055.5,6654.5 7055.5,6549.5 7085,6520 7200,6520 7230.04,6550.04 D67.2@7230.04,6750 ; 6839.32,6620 ccw(c6839.32,6565.68) 6800.91,6604.09 cw(c6839.32,6565.68) 6839.32,6620 ; 6839.32,6620 cw(c6839.32,6674.32) 6800.91,6635.91 ccw(c6839.32,6674.32) 6839.32,6620 ; 7230.04,6705.42 ccw(c7185.46,6705.42) 7216.98,6736.94 cw(c7185.46,6705.42) 7230.04,6705.42 ; 7230.04,6705.42 cw(c7274.62,6705.42) 7243.1,6736.94 ccw(c7274.62,6705.42) 7230.04,6705.42 ; 7230.04,6556.49 cw(c7278.55,6556.49) 7244.25,6590.79 ccw(c7278.55,6556.49) 7230.04,6556.49 ; 7230.04,6653.51 ccw(c7278.55,6653.51) 7244.25,6619.21 cw(c7278.55,6653.51) 7230.04,6653.51
  Top Layer w40: C4.2@5456.02,4840 5456.02,4753.98 5460,4750 ; U4.4@5545,4710 5500,4710 5460,4750 ; 6250.65,4810.43 cw(c6208.85,4786.29) C46.2@6254.89,4771.8 ; U9.1@6275,4650 6275,4753.98 C46.2@6263.98,4765 6245,4783.98 6245,5485 6245,5650 6305,5710 6465,5710 6513.98,5758.98 R2.2@6513.98,5875 ; C69.2@6636.02,5335 C11.2@6636.02,5416 6672.02,5380 MC1.11@6760,5380 ; C11.2@6638.49,5402.86 cw(c6652.58,5350.29) 6679.79,5397.42 ; 6700.92,5389.52 ccw(c6715.53,5444.04) MC1.11@6743.75,5395.16 ; 6708.65,5366.73 ccw(c6696.42,5412.38) MC1.11@6737.34,5388.75 ; 6715.49,5368.57 cw(c6725.13,5332.59) MC1.11@6743.75,5364.84 ; 5460,4750 ccw(c5518.63,4808.63) 5534.21,4727.19 cw(c5518.63,4808.63) 5460,4750 ; 6275,4692.25 ccw(c6317.25,4692.25) 6287.37,4662.37 cw(c6317.25,4692.25) 6275,4692.25 ; 6275,4692.25 cw(c6232.75,4692.25) 6262.63,4662.37 ccw(c6232.75,4692.25) 6275,4692.25 ; 6710.25,5380 ccw(c6710.25,5422.25) 6740.13,5392.37 cw(c6710.25,5422.25) 6710.25,5380 ; 6710.25,5380 cw(c6710.25,5337.75) 6740.13,5367.63 ccw(c6710.25,5337.75) 6710.25,5380 ; 6245,4837.75 ccw(c6332.79,4837.75) 6270.71,4775.67 cw(c6332.79,4837.75) 6245,4837.75 ; C46.2@6257.24,4754.33 cw(c6214.36,4711.45) 6275,4711.45 ccw(c6214.36,4711.45) C46.2@6257.24,4754.33 ; C11.2@6636.02,5402.54 cw(c6636.02,5370.03) 6659.01,5393.01 ccw(c6636.02,5370.03) C11.2@6636.02,5402.54 ; C69.2@6642.76,5332.2 cw(c6758.16,5216.8) 6758.16,5380 ccw(c6758.16,5216.8) C69.2@6642.76,5332.2 ; C11.2@6642.76,5418.8 ccw(c6736.43,5512.47) 6736.43,5380 cw(c6736.43,5512.47) C11.2@6642.76,5418.8
  Bottom Layer w18: v1(5050,5850) v1(5050,6000) ; 5050,5900.7 ccw(c5100.7,5900.7) 5064.85,5864.85 cw(c5100.7,5900.7) 5050,5900.7 ; 5050,5900.7 cw(c4999.3,5900.7) 5035.15,5864.85 ccw(c4999.3,5900.7) 5050,5900.7 ; 5050,5949.3 ccw(c4999.3,5949.3) 5035.15,5985.15 cw(c4999.3,5949.3) 5050,5949.3 ; 5050,5949.3 cw(c5100.7,5949.3) 5064.85,5985.15 ccw(c5100.7,5949.3) 5050,5949.3
  Bottom Layer w22: v1(4200,6730) 4715,6730 v1(4830,6845) ; 4245.87,6730 ccw(c4245.87,6684.13) 4213.44,6716.56 cw(c4245.87,6684.13) 4245.87,6730 ; 4245.87,6730 cw(c4245.87,6775.87) 4213.44,6743.44 ccw(c4245.87,6775.87) 4245.87,6730 ; 4797.56,6812.56 ccw(c4765.13,6845) 4811,6845 cw(c4765.13,6845) 4797.56,6812.56 ; 4797.56,6812.56 cw(c4830,6780.13) 4830,6826 ccw(c4830,6780.13) 4797.56,6812.56
  Bottom Layer w40: v1(4830,6845) 5620,6845 5765,6990 6715,6990 6755.91,6949.09 6755.91,6870.08 6755.91,6825.91 6700,6770 6700,6660 ; U4.4@5545,4710 5800,4710 ; U9.1@6275,4650 6090,4650 5990,4550 5855,4550 5800,4605 5800,4710 ; 6718.08,6784.23 cw(c6814.64,6758.35) 6764.66,6844.92 ; MC1.11@6781.28,5369.21 cw(c6799,5355.34) 6810.26,5374.83 ; 6956,5387 6956,6565 6901,6620 C68.2@6785,6620 6740,6620 6700,6660 ; MC1.32@7360,5580 7174,5580 6961,5367 6811,5367 ; 5594.75,4710 ccw(c5594.75,4667.75) 5564.87,4697.63 cw(c5594.75,4667.75) 5594.75,4710 ; 5594.75,4710 cw(c5594.75,4752.25) 5564.87,4722.37 ccw(c5594.75,4752.25) 5594.75,4710 ; 5800,4710 5800,5510 5895,5605 6150,5605 6375,5380 MC1.11@6760,5380 6798,5380 6811,5367 ; 6225.25,4650 ccw(c6225.25,4692.25) 6255.13,4662.37 cw(c6225.25,4692.25) 6225.25,4650 ; 6225.25,4650 cw(c6225.25,4607.75) 6255.13,4637.63 ccw(c6225.25,4607.75) 6225.25,4650 ; 6700,6660 ccw(c6761.07,6721.06) 6780.97,6637.03 cw(c6761.07,6721.06) 6700,6660 ; 6710.25,5380 ccw(c6710.25,5422.25) 6740.13,5392.37 cw(c6710.25,5422.25) 6710.25,5380 ; 6710.25,5380 cw(c6710.25,5337.75) 6740.13,5367.63 ccw(c6710.25,5337.75) 6710.25,5380 ; 6742.75,6620 ccw(c6742.75,6662.25) 6772.63,6632.37 cw(c6742.75,6662.25) 6742.75,6620 ; 6742.75,6620 cw(c6742.75,6577.75) 6772.63,6607.63 ccw(c6742.75,6577.75) 6742.75,6620 ; 6755.91,6922.33 ccw(c6798.15,6922.33) 6768.28,6892.45 cw(c6798.15,6922.33) 6755.91,6922.33 ; 6755.91,6922.33 cw(c6713.66,6922.33) 6743.53,6892.45 ccw(c6713.66,6922.33) 6755.91,6922.33 ; 6811,5367 cw(c6811,5395.77) 6783.95,5385.96 ccw(c6811,5395.77) 6811,5367 ; 6811,5367 ccw(c6795.12,5351.12) 6779.59,5367.35 cw(c6795.12,5351.12) 6811,5367 ; 6827.25,6620 ccw(c6827.25,6577.75) 6797.37,6607.63 cw(c6827.25,6577.75) 6827.25,6620 ; 6827.25,6620 cw(c6827.25,6662.25) 6797.37,6632.37 ccw(c6827.25,6662.25) 6827.25,6620 ; 7310.25,5580 ccw(c7310.25,5622.25) 7340.13,5592.37 cw(c7310.25,5622.25) 7310.25,5580 ; 7310.25,5580 cw(c7310.25,5537.75) 7340.13,5567.63 ccw(c7310.25,5537.75) 7310.25,5580 ; 6701.87,6771.87 ccw(c6613.66,6860.08) 6738.41,6860.08 cw(c6613.66,6860.08) 6701.87,6771.87 ; MC1.11@6779.87,5392.37 ccw(c6841.13,5453.63) 6841.13,5367 cw(c6841.13,5453.63) MC1.11@6779.87,5392.37
pads on no net: "P2 RELAYS.9" "P2 RELAYS.10" "P3 ANALOG.8" P1PANEL.14 P1PANEL.15 P1PANEL.16 P1PANEL.17 P1PANEL.18 P4KB.13 P4KB.17 P4KB.18 P4KB.19 P4KB.20 PSTR1.2 PSTR1.3 PSTR1.4 U3.12 U3.13 U3.14
copper on no net: | length 28346.5
  Top Layer w8: 3937.01,3937.01 7874.02,3937.01 7874.02,7086.61 3937.01,7086.61 3937.01,3937.01
  Bottom Layer w8: 3937.01,3937.01 7874.02,3937.01 7874.02,7086.61 3937.01,7086.61 3937.01,3937.01

## Polygon pours and split planes (outlines as drawn)
FLDIRIN on Bottom Layer "Top Layer-No Net" (solid, pour order 110): 4155,5930 4278,5930 4331,5983 4436,6088 4436,6091 4436,6096 4433,6099 4418,6099 4321,6002 4319,6000 4155,6000
CONT_S_IN on Bottom Layer "Top Layer-No Net" (solid, pour order 109): 4221,5676 4195,5702 4156,5702 4156,5630 4195,5630 4223,5658
GND on Bottom Layer "Top Layer-No Net" (solid, pour order 74): 28 vertices, not listed, extent 6750,5695 7235,6915
GND on Bottom Layer "Top Layer-No Net" (solid, pour order 77): 7360,5515 7195,5515 7130,5450 6995,5315 6760,5315 6760,5245 7185,5245 7270,5330 7285,5345 7285,5400 7285,5420 7305,5440 7310,5445 7360,5445
VCC on Bottom Layer "Top Layer-No Net" (solid, pour order 78): 45 vertices, not listed, extent 6665,5335 7360,6870
VCC on Bottom Layer "Top Layer-No Net" (solid, pour order 79): 32 vertices, not listed, extent 4070,6630 6790,7035
VCC on Bottom Layer "Top Layer-No Net" (solid, pour order 80): 41 vertices, not listed, extent 5500,4510 6760,5625
GND on Bottom Layer "Top Layer-No Net" (solid, pour order 81): 58 vertices, not listed, extent 5850,4695 6760,5310
GND on Bottom Layer "Top Layer-No Net" (solid, pour order 82): 22 vertices, not listed, extent 5850,5180 6770,5515
GND on Bottom Layer "Top Layer-No Net" (solid, pour order 83): 48 vertices, not listed, extent 5355,4125 6540,4705
GND on Bottom Layer "Top Layer-No Net" (solid, pour order 84): 18 vertices, not listed, extent 4100,4100 5670,4460
GND on Bottom Layer "Top Layer-No Net" (solid, pour order 85): 46 vertices, not listed, extent 4310,4385 5455,5235
GND on Bottom Layer "Top Layer-No Net" (solid, pour order 86): 5380,4605 5380,4750 5510,4880 5620,4990 5620,5025 5580,5065 5550,5065 5495,5010 5320,4835 5320,4640
GND on Bottom Layer "Top Layer-No Net" (solid, pour order 87): 5380,4525 5380,4680 5370,4690 5320,4640 5320,4595 5320,4525 5325,4520
GND on Bottom Layer "Top Layer-No Net" (solid, pour order 88): 23 vertices, not listed, extent 4820,4535 5395,4895
GND on Bottom Layer "Top Layer-No Net" (solid, pour order 89): 36 vertices, not listed, extent 4940,4530 5345,4830
GND on Bottom Layer "Top Layer-No Net" (solid, pour order 90): 4800,4645 4810,4645 4830,4665 4870,4625 4870,4595 4800,4595 4795,4590
GND on Bottom Layer "Top Layer-No Net" (solid, pour order 91): 23 vertices, not listed, extent 4570,4625 4920,4910
GND on Bottom Layer "Top Layer-No Net" (solid, pour order 92): 4685,4645 4645,4685 4645,4590 4690,4590 4695,4595
GND on Bottom Layer "Top Layer-No Net" (solid, pour order 93): 35 vertices, not listed, extent 4495,4800 5515,5235
GND on Bottom Layer "Top Layer-No Net" (solid, pour order 94): 4985,5175 4985,5190 5005,5210 5010,5215 5060,5215 5090,5215 5105,5200 5125,5220 5145,5220 5130,5235 4905,5235 4905,5185 4910,5180 4925,5165 4985,5165
VCC on Bottom Layer "Top Layer-No Net" (solid, pour order 95): 5025,5800 5125,5800 5155,5830 5155,6025 5135,6045 5125,6055 5015,6055 4990,6030 4990,5985 4990,5835 5025,5800
GND on Bottom Layer "Top Layer-No Net" (solid, pour order 96): 34 vertices, not listed, extent 4230,5315 5770,6720
GND on Bottom Layer "Top Layer-No Net" (solid, pour order 97): 6800,5245 6820,5245 6850,5215 6850,5060 6890,5020 6895,5015 7075,5015 7255,5015 7280,5040 7285,5045 7285,5345
GND on Bottom Layer "Top Layer-No Net" (solid, pour order 98): 7285,5275 7285,5410 7270,5425 7145,5300 7145,5280 7260,5280 7265,5275
ANALOGIN on Bottom Layer "Top Layer-No Net" (solid, pour order 99): 6765,6245 6550,6245 6510,6285 6440,6355 6440,6710 6510,6710 6510,6385 6560,6335 6565,6330 6670,6330 6675,6330 6690,6315 6765,6315
GND on Bottom Layer "Top Layer-No Net" (solid, pour order 100): 35 vertices, not listed, extent 5895,5820 6675,6625
GND on Bottom Layer "Top Layer-No Net" (solid, pour order 101): 5685.52,6380.85 5691.37,6375 5740,6375 5755,6390 5755,6435 5755,6555 5750,6560 5685,6625 5615,6625 5205,6625 5175,6595 5335,6435 5510,6435 5631.37,6435 5685.52,6380.85
GND on Bottom Layer "Top Layer-No Net" (solid, pour order 102): 7235,6410 7320,6495 7580,6495 7590,6495 7700,6605 7700,6855 7640,6915 7035,6915 7035,6790 6955,6710 7135,6530 7135,6385
R1IN on Bottom Layer "Top Layer-No Net" (solid, pour order 111): 23 vertices, not listed, extent 4015,4465 4250,5300
TIOUT on Bottom Layer "Top Layer-No Net" (solid, pour order 112): 17 vertices, not listed, extent 4150,4725 4365,5200
GND on Bottom Layer "Top Layer-No Net" (solid, pour order 129): 6090,4425 6090,4575 6110,4595 6095,4595 6085,4585 5980,4480 5955,4480 6025,4480 6105,4400
DG-Y_ on Bottom Layer "Top Layer-No Net" (solid, pour order 140): 5974,6771 5952,6749 5952,6727 5983,6727 5990,6734 6006,6750 6006,6771
EB-R_ on Bottom Layer "Top Layer-No Net" (solid, pour order 141): 6170,6770 6148,6748 6148,6732 6188,6732 6190,6730 6209,6749 6209,6773 6203,6773 6189,6787
EB-Y_ on Bottom Layer "Top Layer-No Net" (solid, pour order 142): 6270,6772 6238,6740 6238,6714 6254,6714 6296,6756 6277,6775 6273,6775
EB-B_ on Bottom Layer "Top Layer-No Net" (solid, pour order 143): 6370,6772 6338,6740 6338,6725 6359,6725 6402,6768
NetC3_2 on Bottom Layer "Top Layer-No Net" (solid, pour order 145): 6686,5055 6693,5062 6720,5062 6720,5070 6734,5084 6730,5080 6696,5080 6696,5079 6677,5060
REMOTIN on Top Layer "Top Layer-No Net" (solid, pour order 106): 4154,5802 4202,5802 4220,5820 4230,5820 4230,5816 4238,5808 4238,5768 4212,5742 4201,5731 4154,5731
GND on Top Layer "Top Layer-No Net" (solid, pour order 75): 22 vertices, not listed, extent 7000,5375 7360,5830
GND on Top Layer "Top Layer-No Net" (solid, pour order 76): 7190,5375 7220,5345 7255,5345 7265,5345 7290,5370 7290,5415 7290,5470 7280,5460 7220,5460 7165,5460 7135,5430
GND on Top Layer "Top Layer-No Net" (solid, pour order 103): 24 vertices, not listed, extent 6590,6585 7025,6875
VCC on Top Layer "Top Layer-No Net" (solid, pour order 104): 24 vertices, not listed, extent 6750,6580 7070,6695
VCC on Top Layer "Top Layer-No Net" (solid, pour order 105): 38 vertices, not listed, extent 6225,4615 6545,6110
GND on Top Layer "Top Layer-No Net" (solid, pour order 107): 86 vertices, not listed, extent 5125,5365 6305,6115
GND on Top Layer "Top Layer-No Net" (solid, pour order 108): 6345,4960 6365,4980 6425,4980 6460,4980 6460,5120 6375,5120 6345,5150 6330,5135 6330,4960
VCC on Top Layer "Top Layer-No Net" (solid, pour order 113): 29 vertices, not listed, extent 4750,4220 5550,4845
GND on Top Layer "Top Layer-No Net" (solid, pour order 114): 18 vertices, not listed, extent 5245,4575 5360,4845
GND on Top Layer "Top Layer-No Net" (solid, pour order 115): 52 vertices, not listed, extent 4295,4780 5360,5100
GND on Top Layer "Top Layer-No Net" (solid, pour order 116): 4350,5135 4350,5380 4310,5420 4290,5440 4255,5440 4235,5420 4235,5375 4235,5170 4295,5110 4325,5080 4350,5080
NetR8_2 on Top Layer "Top Layer-No Net" (solid, pour order 117): 18 vertices, not listed, extent 4910,5130 5100,5285
BTSBATT on Top Layer "Top Layer-No Net" (solid, pour order 118): 4715,4985 4825,4985 4830,4980 4840,4970 4840,4925 4775,4860 4760,4860 4745,4860 4685,4920 4685,4985
NetR8_2 on Top Layer "Top Layer-No Net" (solid, pour order 119): 4935,4925 5000,4925 5065,4990 5075,5000 5075,5030 5070,5035 5015,5035 4965,4985 4945,4965 4935,4965
FLG on Top Layer "Top Layer-No Net" (solid, pour order 120): 5385,5110 5385,4990 5435,4990 5515,5070 5635,5070 5635,5130 5395,5130 5385,5120
FLDIR on Top Layer "Top Layer-No Net" (solid, pour order 121): 4785,5660 4785,5770 4795,5780 4865,5710 4920,5710 5040,5710 5040,5655 5025,5655 4995,5685 4990,5690 4880,5690 4868.98,5690 4813.98,5635 4785,5635
CONT_SENSE on Top Layer "Top Layer-No Net" (solid, pour order 122): 4660,5950 4660,5835 4665,5830 4670,5825 4715,5825 4760,5870 4760,5920 4705,5975 4695,5975 4670,5975 4660,5965
REMOT on Top Layer "Top Layer-No Net" (solid, pour order 123): 4660,6120 4660,6230 4695,6230 4710,6245 4710,6225 4750,6185 4750,6135 4705,6090 4705,6085 4660,6085
LLOP on Top Layer "Top Layer-No Net" (solid, pour order 124): 4710,6355 4715,6355 4755,6395 4755,6425 4755,6435 4750,6440 4705,6485 4705,6490 4680,6490 4660,6470 4660,6380 4660,6360 4665,6355 4660,6355
GND on Top Layer "Top Layer-No Net" (solid, pour order 125): 4614,6511 4614,6529 4617,6532 4630,6532 4636,6526 4636,6510
GND on Top Layer "Top Layer-No Net" (solid, pour order 126): 35 vertices, not listed, extent 4125,4065 4790,4645
GND on Top Layer "Top Layer-No Net" (solid, pour order 127): 25 vertices, not listed, extent 6365,4680 6705,5240
GND on Top Layer "Top Layer-No Net" (solid, pour order 128): 31 vertices, not listed, extent 6320,5095 6765,5450
GND on Top Layer "Top Layer-No Net" (solid, pour order 130): 48 vertices, not listed, extent 5655,4315 6585,5560
GND on Top Layer "Top Layer-No Net" (solid, pour order 131): 20 vertices, not listed, extent 6865,5460 7305,6485
GND on Top Layer "Top Layer-No Net" (solid, pour order 132): 38 vertices, not listed, extent 6820,6390 7700,7015
NetD1_2 on Top Layer "Top Layer-No Net" (solid, pour order 133): 6340,5580 6415,5580 6450,5545 6525,5545 6525,5600 6530,5605 6490,5645 6405,5645 6340,5645
NetR21_1 on Top Layer "Top Layer-No Net" (solid, pour order 134): 18 vertices, not listed, extent 5320,5315 5480,5685
GND on Top Layer "Top Layer-No Net" (solid, pour order 135): 33 vertices, not listed, extent 4745,5735 5195,6155
VCC on Top Layer "Top Layer-No Net" (solid, pour order 136): 4880,6690 4880,6695 4850,6725 4830,6745 4830,6845 4830,6870 4845,6870 4890,6825 4900,6815 4900,6690 4890,6690
GND on Top Layer "Top Layer-No Net" (solid, pour order 137): 18 vertices, not listed, extent 5280,4825 5725,5025
GND on Top Layer "Top Layer-No Net" (solid, pour order 138): 4245,4100 4850,4100 4880,4130 4880,4170 4855,4195 4815,4195 4780,4230 4715,4295 4560,4295 4415,4295 4375,4335 4275,4435 4275,4465 4125,4315 4125,4100
VCC on Top Layer "Top Layer-No Net" (solid, pour order 139): 20 vertices, not listed, extent 6415,5310 6765,5510
RC6 on Top Layer "Top Layer-No Net" (solid, pour order 144): 18 vertices, not listed, extent 6084.5,4270 6162,4330
GND on Top Solder "Top Layer-No Net" (solid): 5770,4550 6075,4550 6075,4450 5770,4450

## Keep-outs
Keep-Out Layer:
  lines w8: 3937.01,3937.01 7874.02,3937.01 7874.02,7086.61 3937.01,7086.61 3937.01,3937.01
  lines w10: 7936.47,3948.03 9393.17,3948.03 9393.17,5640.94 7936.47,5640.94 7936.47,3948.03
  text "KEEPOUT LAYER" at 7980.35,5473.52 h70
  text "PCB INFORMATION:" at 7980.35,5271.65 h70
  text "PCB: FR-4" at 7980.35,5069.77 h70
  text "THICKNESS:35MICRONS" at 7980.35,4867.9 h70
  text "LAYERS TO PRINT:" at 7980.35,4666.02 h70
  text "TOP LAYER CU" at 8299.35,4531.02 h60
  text "TOP LEGEND" at 8299.35,4407.27 h60
  text "TOP SOLDER" at 8299.35,4283.52 h60
  text "BOTTOM SOLDER" at 8299.35,4159.77 h60
  text "BOTTOM LAYER CU" at 8299.35,4036.02 h60

## Other copper
Top Layer:
  text "TOP LAYER CU" at 7935.35,6991.02 h70
  text "COMPONENT SIDE" at 5540.23,3999 h60
Bottom Layer:
  text "BOTTOM LAYER CU" at 7935.35,6774.52 h70
  text "SIMCONS   A1 rev3.0" at 7810,6305 h60 r90
  text "SOLDER SIDE" at 6260,3999 h60

## Silkscreen, mask and mechanical layers (free items; w line width, h text height)
Top Overlay:
  the board outline again, w8
  text "S/N:" at 5775,7000 h90 r180
  text "TOP LEGEND" at 7935.35,6558.02 h70
  text "SIMCONS CONTROL SYSTMES" at 7545,4470 h80 r90
  text "A1 rev3.0" at 4715,3995 h80
Top Solder:
  the board outline again, w8
  text "TOP SOLDER" at 7935.35,6341.52 h70
Bottom Solder:
  the board outline again, w8
  text "BOTTOM SOLDER" at 7935.35,6125.02 h70